# Altium PCB PCB1.PcbDoc
Units mil, origin at the board's own origin, x right, y up, seen from the top; angles counter-clockwise.
Board outline 4163.77 x 2203.22 mil, 2 copper layers (Top Layer, Bottom Layer); 20 components, 11 nets, 51 pads, 7 vias.
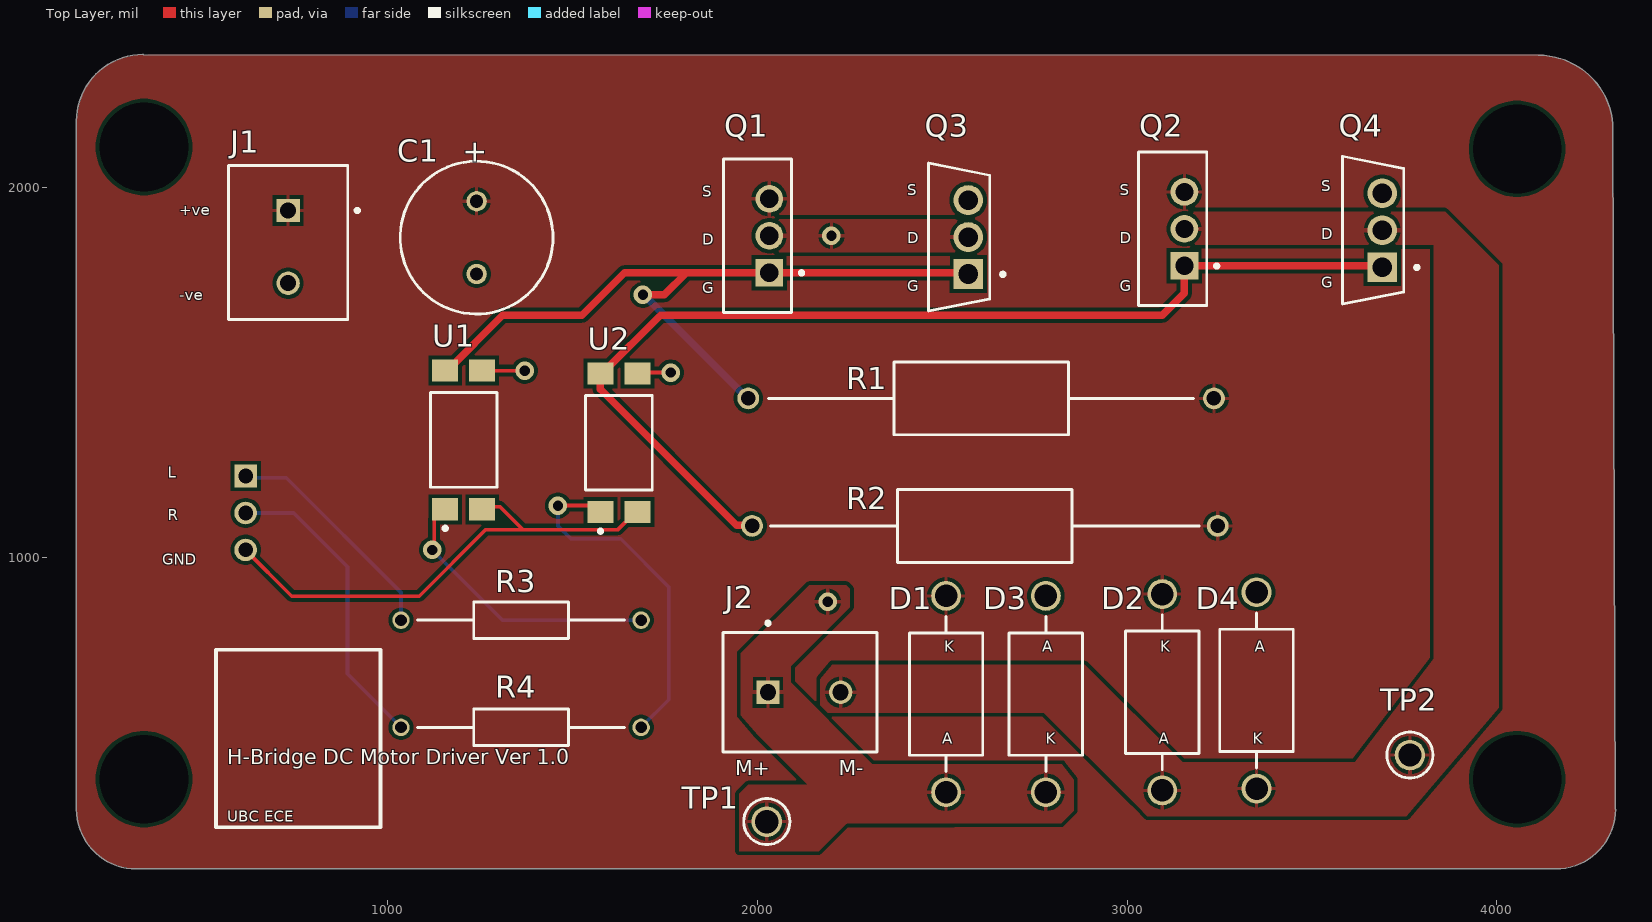
[diagram p0: Top Layer view]
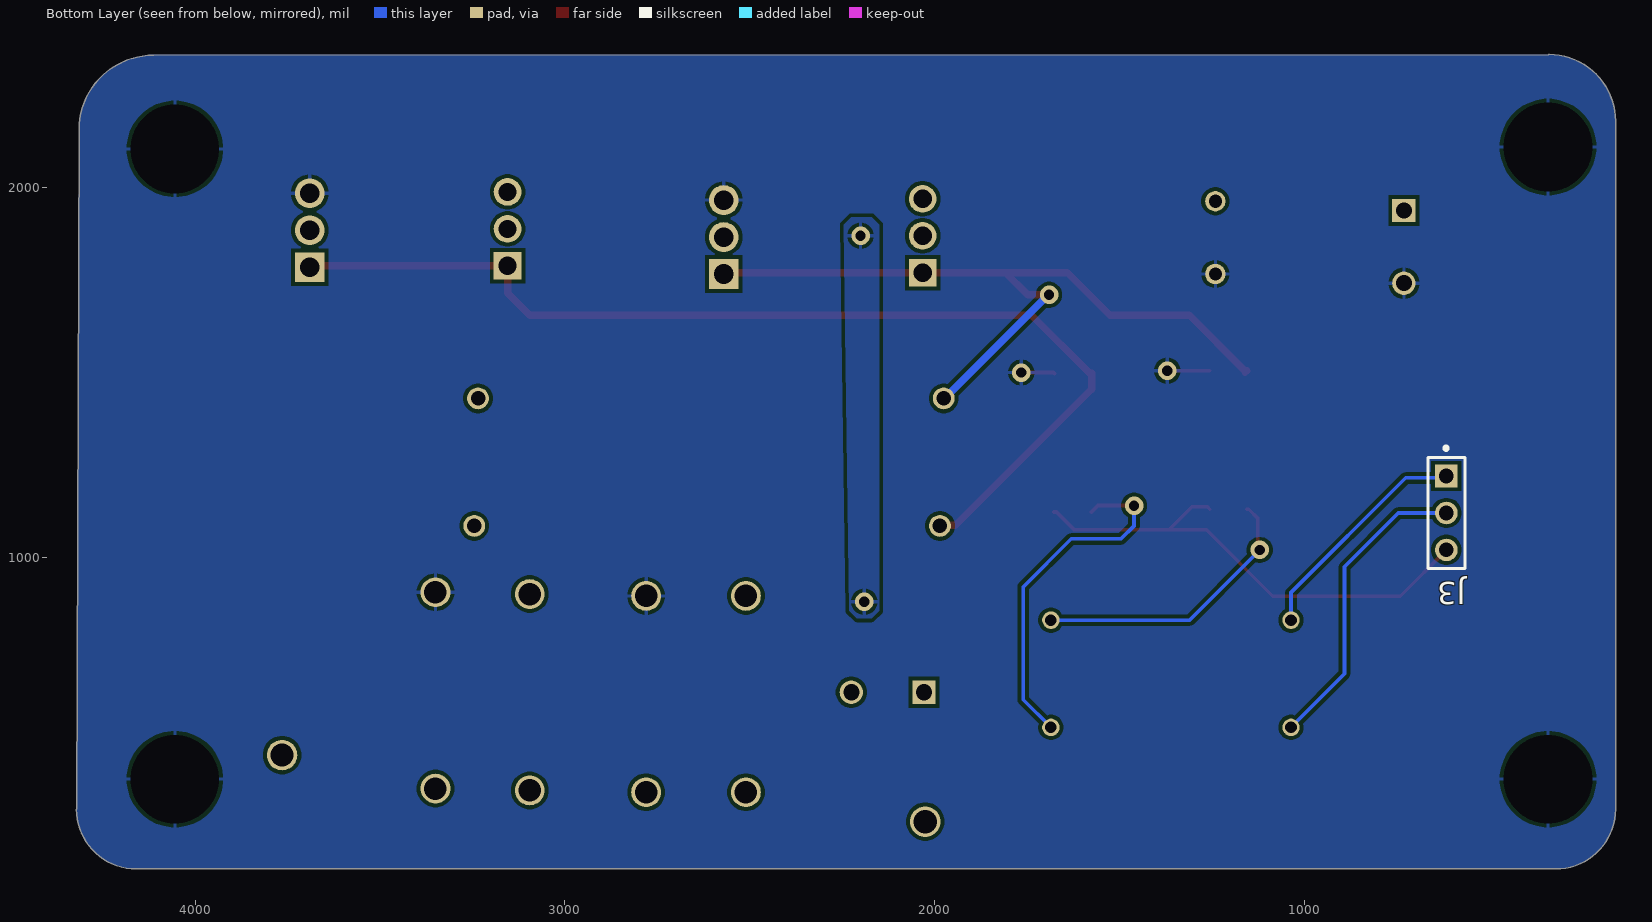
[diagram p1: Bottom Layer view, seen from below]
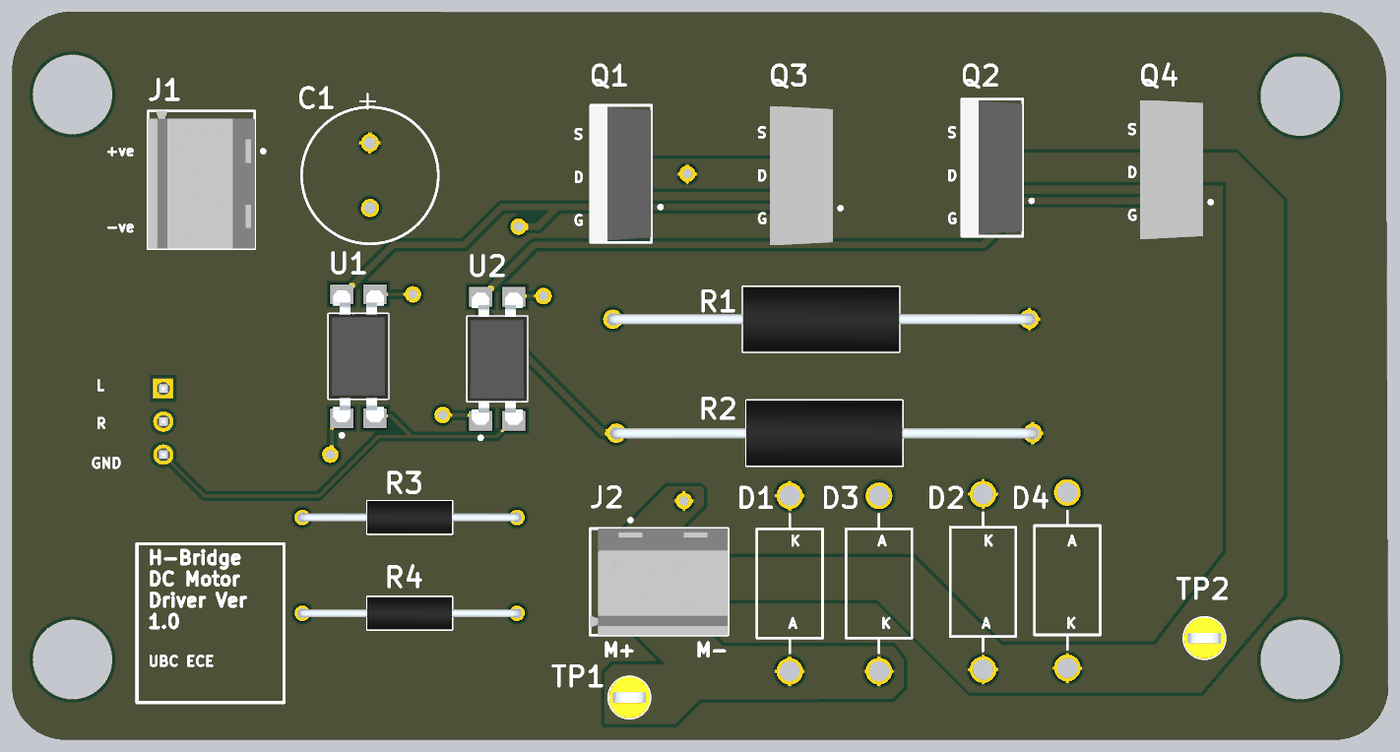
[diagram p2: 3D render of the assembled board from above, using the file's embedded part models]

## Layer stack, top to bottom
Top Solder: solder mask 0.4, Solder Resist, Dk 3.5
Top Layer: signal copper 1.4
Dielectric 1: dielectric 12.6, FR-4, Dk 4.8
Bottom Layer: signal copper 1.4
Bottom Solder: solder mask 0.4, Solder Resist, Dk 3.5

## Board outline
157.45,318.6 ccw(c318.82,318.6) 318.82,157.22 4160,157.22 ccw(c4159.84,318.6) 4321.22,318.6 4320,318.6 4314.31,2156.89 ccw(c4112.54,2156.69) 4112.54,2358.46 337.45,2360 337.45,2360.44 ccw(c337.45,2180.44) 157.45,2180.44

## Design rules (kind name [scope] priority, off if disabled: settings)
Clearance [All] p1: gap=10 ignorepadtopadclearanceinfootprint=FALSE except(0: Arc-Hole Track-Hole SMDPad-Hole THPad-Hole Via-Hole Fill-Hole Poly-Hole Region-Hole Text-Hole)
HoleSize [All] p1: absolutevalues=TRUE maxlimit=500 minlimit=1 maxpercent=80.000 minpercent=20.000
PolygonConnect [All] p1: connectstyle=Relief reliefconductorwidth=10 reliefentries=4 polygonreliefangle="90 Angle" airgapwidth=10
RoutingPriority RoutingPriority_1 [All] p1: routingpriority=0
RoutingPriority [All] p2: routingpriority=0
RoutingVias [All] p1: holewidth=28 width=50 viastyle="Through Hole" minholewidth=28 minwidth=50 maxholewidth=28 maxwidth=50
SMDNeckDown [All] p1: percent=50.000
SolderMaskExpansion [All] p1: expansion=4 istentingtop=FALSE
Width [(InNet('MosfetGateL') AND InNet('MosfetGateR'))] p1: maxlimit=20 minlimit=20 preferedwidth=20 minimp=50.000000 maximp=50.000000 favimp=50.000000
28 further rules are at their usual default settings.

## Components (designator, comment, footprint, x,y, rotation, side; value= is the part's Value field where it differs from the comment)
C1 "470uF" PNSC-CAP-10x20-P2 1240,1865 r270 top
D1 "MUR410RLG" ONSC-AXIAL_LEAD-2-267-05_V 2510,630 r270 top
D2 "MUR410RLG" ONSC-AXIAL_LEAD-2-267-05_V 3095,635 r270 top
D3 "MUR410RLG" ONSC-AXIAL_LEAD-2-267-05_V 2780,630 r90 top
D4 "MUR410RLG" ONSC-AXIAL_LEAD-2-267-05_V 3350,640 r90 top
J1 "282836-2" TECO-282836-2_V 730,1840 r270 top
J2 "282836-2" TECO-282836-2_V 2126.57,635 r0 top
J3 "90120-0763" FP-90120-0763-MFG 615,1120 r270 bottom
Q1 "IRF5305PBF" FP-PG-TO220-3-0 2000,1870 r180 top
Q2 "IRF5305PBF" FP-PG-TO220-3-0 3123.11,1888.62 r180 top
Q3 "IRF540NPBF" Infineon_IRF540NPBF_0 2545.59,1866.38 r180 top
Q4 "IRF540NPBF" Infineon_IRF540NPBF_0 3665.59,1885 r180 top
R1 "10k" RESAD3200W81L1200D500 3234.84,1430 r180 top
R2 "10k" RESAD3200W81L1200D500 3245,1085 r180 top
R3 "220" RESAD1650W60L650D250 1035.39,830 r0 top
R4 "220" RESAD1650W60L650D250 1685,540 r180 top
TP1 "5014" KSTN-5014_V 2025,285 r0 top
TP2 "5014" KSTN-5014_V 3765,465 r0 top
U1 "VO615A-8X017T" VISH-VO615A-XX017T_V 1205,1317.6 r90 top
U2 "VO615A-8X017T" VISH-VO615A-XX017T_V 1625,1310 r90 top

## Footprints (in the part's own frame and the unit in brackets; to place one, negate y for a bottom-side part, rotate by r counter-clockwise, add the part's x,y. Pads: shape width x height; smd on the part's side, far side on the other; paste and mask are expansions set on the pad)
FP-90120-0763-MFG [mm]
  rect 1.55x1.55 hole 1 paste-1000 mask+0: 1(-2.54,0)
  round 1.55 hole 1 paste-1000 mask+0: 2(0,0) 3(2.54,0)
  silkscreen extent -4.57,-1.27 3.81,1.27, body extent -3.81,-1.25 3.81,1.25, height 9.65
FP-PG-TO220-3-0 [mm]
  rect 1.9x1.9 hole 1.25 paste-1000 mask+0: 1(-0.81,2.54)
  round 1.9 hole 1.25 paste-1000 mask+0: 2(-0.81,0) 3(-0.81,-2.54)
  silkscreen extent -3.15,-5.27 2.35,5.27, body extent -2.44,-5.37 2.44,5.37, height 0.25
Infineon_IRF540NPBF_0 [mm]
  rect 2.05x2.05 hole 1.35 paste-1000 mask+0: 1(-0.62,2.54)
  round 2.05 hole 1.35 paste-1000 mask+0: 2(-0.62,0) 3(-0.62,-2.54)
  silkscreen extent -3.13,-5.08 2.1,5.08, body extent -2.51,-5.56 2.51,5.56, height 0.25
KSTN-5014_V [mm] "Test Point, Dia 3.17mm"
  round 2.1 hole 1.6: 1(0,0)
  silkscreen extent -1.59,-1.58 1.59,1.58, body extent -1.59,-1.59 1.59,1.59, height 8.13
ONSC-AXIAL_LEAD-2-267-05_V [mm] "AXIAL, 2-Leads, Diameter 5.05mm"
  round 2.05 hole 1.55: 1(-6.745,0) 2(6.745,0)
  silkscreen extent -5.32,-2.52 5.32,2.52
PNSC-CAP-10x20-P2 [mm] "THD, 2-Leads, Dia 10.5mm, Body Length 22mm, Pin Spacing 5mm"
  round 1.4 hole 0.9: 1(-2.5,0) 2(2.5,0)
  silkscreen extent -5.25,-5.25 5.25,5.25, body extent -5.25,-5.25 5.25,5.25, height 22
RESAD1650W60L650D250 [mm]
  round 1.2 hole 0.8: 1(0,0) 2(16.5,0)
  silkscreen extent 1.13,-1.25 15.36,1.25, body extent -0.3,-1.25 16.8,1.25, height 2.49
RESAD3200W81L1200D500 [mm]
  round 1.5 hole 1: 1(0,0) 2(32,0)
  silkscreen extent 1.39,-2.5 30.6,2.5, body extent -0.4,-2.5 32.41,2.5, height 5
TECO-282836-2_V [mm] "Female Header, Pitch 5mm, 1 x 2 Position, Height 10mm"
  rect 1.6x1.6 hole 1.1: 1(-2.5,0)
  round 1.6 hole 1.1: 2(2.5,0)
  silkscreen extent -5.6,-4.1 5,4.88, body extent -5.6,-4.1 5,4.1, height 10
VISH-VO615A-XX017T_V [mm] "SMD, 4-Leads, Body 6.5x4.58mm, Pitch 2.54mm"
  rect 1.52x1.78 smd: 1(-4.765,1.27) 2(-4.765,-1.27) 3(4.765,-1.27) 4(4.765,1.27)
  silkscreen extent -6.2,-2.29 3.25,2.29, body extent -5.08,-2.29 5.08,2.29, height 3.69

## Part data
C1: library part CMP-2000-05308-1, "Aluminum Electrolytic Capacitor, 470 uF, +/- 20%, 50 V, -55 to 105 degC, 2-Pin THD, RoHS, Bulk", Capacitance=470µF, Case Size/Dimension=Ø10x20mm, Lifetime@Temperature=2000Hrs@105degC, Manufacturer=Panasonic, Operating Temp Range=-55to+105degC, Operating Temp-Max=105degC, Package Description="2-Pin Through Hole Device, Dia 10 mm, Body Length 20 mm, Pin Spacing 5 mm", Package Reference=CAP-10x20-P2, Package Version=Nov-12, Rated Voltage=50V, Ripple Current=530mA, Datasheet URL=http://www.alliedelec.com/images/products/datasheets/bm/Panasonic/70067776.pdf, Datasheet Version=Nov-12, Manufacturer URL=http://www.panasonic.com/, Package URL=http://www.alliedelec.com/images/products/datasheets/bm/Panasonic/70067776.pdf, Series=NHG, Type=Radial
D1 D2 D3 D4: library part CMP-0902-00013-1, "SWITCHMODE(TM) Power Rectifier, 2-Pin Axial_Lead, Pb-Free, Tape and Reel", Manufacturer="On Semiconductor", ComponentLink1Description="Manufacturer URL", ComponentLink1URL=http://www.onsemi.com/, ComponentLink2Description=Datasheet, ComponentLink2URL=http://www.onsemi.cn/pub_link/Collateral/MUR420-D.PDF, ComponentLink3Description="Package Specification", ComponentLink3URL=http://www.onsemi.com/pub_link/Collateral/267-05.PDF, DatasheetVersion="Rev. 15", IFSM Max (A)=125, Mounting Technology="Through Hole", PackageDescription="2-Pin, Axial Lead, Diameter 5.05 mm", PackageReference=AXIAL_LEAD-2-267-05, PackageVersion="Rev. G, 06/2000", Packing="Tape and Reel", PartNumber=MUR410RLG, RoHS=TRUE, Type=Ultrafast, VRRM Max (V)=100
J1 J2: library part CMP-1684-00017-1, "Female Header, Pitch 5 mm, 1 x 2 Position, Height 10 mm, Tail Length 3.5 mm, Rohs, Bulk", Color=Green, Current=13.5A, Manufacturer="TE Connectivity", Package Description="Female Header, Pitch 5 mm, 1 x 2 Position, Height 10 mm, Tail Length 3.5 mm", Package Reference=THD, Standard Package=300, Voltage=300V, 3D Model=282836-2.pdf, Category=Connectors,Interconnects, Clamp Material - Plating=Brass-NickelPlated, Contact Material - Plating=Brass-TinPlated, Datasheet URL=http://www.te.com.cn/commerce/DocumentDelivery/DDEController?Action=showdoc&DocId=Catalog+Section%7F1308389_EUROSTYLE_TERMINAL_BLOCKS%7F0607%7Fpdf%7FEnglish%7FENG_CS_1308389_EUROSTYLE_TERMINAL_BLOCKS_0607.pdf%7F282836-2, Dynamic Catalog=BuchananSeries, Family=TerminalBlocks-WiretoBoard, Featured Product=EurostyleTerminalBlockConnectors, Features=Interlocking(Side), Housing Material=Polyamide(PA66),Nylon6/6, Manufacturer URL=http://www.te.com, Mating Orientation=HorizontalwithBoard, Mounting Type=ThroughHole, Number of Levels=1, Other Names="5ULV-02B / A98076", Packaging=Bulk, Pitch="0.197\"(5.00mm)", Positions Per Level=2, Product Training Modules=Wire-to-BoardEurostyleTerminalBlocks, RoHS Information=282836-2StatementofCompliance, Screw Material - Plating=Brass-NickelPlated, Screw Thread=M3, Series=Buchanan, Torque - Screw=0.68Nm(6Lb-In), Wire Gauge=16-30AWG, Wire Termination=Screw-RisingCageClamp
J3: library part CMP-04776-000084-1, "CONN HEADER VERT 3POS 2.54MM", Current Rating=3A, Manufacturer=Molex, Temperature="-55°C to +125°C", Temperature Range High=+125°C, Temperature Range Low=-55°C, Voltage Rating=350V, Automotive=No, Category=Conn, ComponentLink2Description=Datasheet, ComponentLink2URL=https://www.molex.com/webdocs/datasheets/pdf/en-us/0901200763_PCB_HEADERS.pdf, Conn Gender=Male, Conn Orientation=Vertical, Contact Material=Gold,Nickel, Device Class L1=Connectors, Device Class L2="Headers and Wire Housings", Device Class L3=unset, Digikey Description="CONN HEADER VERT 3POS 2.54MM", Footprint Url=https://www.molex.com/pdm_docs/sd/901200763_sd.pdf, Height=5.8mm, Lead Free=Yes, Manufacturer Part Number=90120-0763, Mouser Description="Board-To-Board Connector, C-Grid III 90120 Series, Through Hole, Header, 3, 2.54 mm", Number of Contacts=3, Number of Rows=1, Octopart=https://octopart.com/90120-0763-molex-655433, Package=90120-0763, Pitch=2.54mm, RoHS=TRUE
Q1 Q2: library part CMP-32901-000003-1, "MOSFET P-CH 55V 31A TO-220AB", Continuous Drain Current=-31A, Drain To Source Breakdown Voltage=-55V, Drain To Source Resistance=0.06Ω, Gate To Source Voltage=20V, Input Capacitace At Vds="1200pF @ -25V", Manufacturer=Infineon, Max Forward Diode Voltage=-1.3V, Max Junction Temp=+175°C, Package=PG-TO220-3, Power Dissipation=110W, Pulse Drain Current=-110A, Temperature="-55°C to +175°C", Temperature Range Low=-55°C, Automotive=No, Category=Trans, ComponentLink2Description=Datasheet, ComponentLink2URL=https://www.infineon.com/dgdl/irf5305pbf.pdf?fileId=5546d462533600a4015355e370101993, Depletion Mode=False, Device Class L1="Discrete Semiconductors", Device Class L2=Transistors, Device Class L3=MOSFETs, Digikey Description="MOSFET P-CH 55V 31A TO-220AB", Drain To Source Voltage=-55V, Gate Charge At Vgs="63nC @ -10V", Height=19.3mm, Lead Free=Yes, Manufacturer Part Number=IRF5305PBF, Number Of Channels=1, Number Of P Channels=1, Octopart=https://octopart.com/irf5305pbf-infineon-65873396, Reverse Recovery Charge=170nC, Reverse Recovery Time=71ns, RoHS=TRUE, Rthja Max=62°C/W, Standoff Height=3.55mm, Temperature Range High=+175°C, Threshold Vgs Max=-4V, Threshold Vgs Min=-2V, Turn Off Delay Time=39ns, Turn On Delay Time=14ns
Q3 Q4: library part Trans_Infineon_IRF540NPBF_eec, "TRANS MOSFET N-CH 100V 33A TO-220AB", Current - Continuous Drain (Id) @ 25°C=33A, Digikey Part Number=IRF540NPBF-ND, Manufacturer=Infineon, Mouser Part Number=942-IRF540NPBF, Package=TO-220AB, Power Dissipation (Max)=130W, Temperature="-55°C to +175°C", Temperature Range High=+175°C, Temperature Range Low=-55°C, ComponentLink1Description=Upverter, ComponentLink1URL=https://upverter.com/upn/revision/62782e0a3528cc6f/, ComponentLink2Description=Datasheet, ComponentLink2URL=https://upverter.com/datasheet/5308f6ed8ea707896f3dcb9c5bff2bbed3412a6b.pdf, Digikey Description="TRANS MOSFET N-CH 100V 33A TO-220AB", helpURL=https://upverter.com/upn/revision/62782e0a3528cc6f/, Ipc Land Pattern Name=TO-220, Lead Free=yes, Part Number=IRF540NPBF, Price=0.985460972103, RoHS=TRUE, Supplier 1=Digi-Key, Supplier 2=Mouser, Supplier Part Number 1=IRF540NPBF-ND, Supplier Part Number 2=942-IRF540NPBF, Vgs (Max)=±20V
R1 R2: library part OM1035E-R58, "Resistor", Manufacturer_Name=Ohmite, Mouser Part Number=588-OM1035E-R58, Datasheet Link=https://www.mouser.com/datasheet/2/942/SF_AGH_Series-1508337.pdf, Manufacturer_Part_Number=OM1035E-R58, Mouser Price/Stock=https://www.mouser.co.uk/ProductDetail/Ohmite/OM1035E-R58?qs=AkUtuiJmyfk0HzUJmzHVdA%3D%3D
R3 R4: library part MRS25000C2200FCT00, "Resistor", Manufacturer_Name=Vishay, Mouser Part Number=594-MRS25000C2200FCT, Arrow Part Number=MRS25000C2200FCT00, Arrow Price/Stock=https://www.arrow.com/en/products/mrs25000c2200fct00/vishay, Datasheet Link=http://www.vishay.com/docs/28724/mrs16m25.pdf, Manufacturer_Part_Number=MRS25000C2200FCT00, Mouser Price/Stock=https://www.mouser.co.uk/ProductDetail/Vishay-BC-Components/MRS25000C2200FCT00?qs=VfXS90KdVcZ%2FSi5qHqznqg%3D%3D
TP1 TP2: library part CMP-1672-00006-4, "Test Point, Yellow, Through Hole, RoHS, Bulk", Colour=Yellow, Manufacturer=Keystone, Package Quantity=100, ComponentLink1Description="Manufacturer URL", ComponentLink1URL=http://www.keyelco.com/, ComponentLink2Description=Datasheet, ComponentLink2URL=http://www.keyelco.com/product-pdf.cfm?p=1323, Contact Material=Bronze, Contact Plating=Silver, DatasheetVersion="Rev. F, 12/2013", Height="8.12 mm", Mount="Through Hole", Mounting Technology="Through Hole", PackageDescription="1-Pin Through Hole Device, Dia 3.17 mm", PackageReference=5014, Packaging=Bulk, REACH SVHC="No SVHC", RoHSCompliant=true
U1 U2: library part CMP-2000-07399-1, "Optocoupler, Phototransistor Output, High Temperature, 5000 VRMS, -55 to 110 degC, 4-Pin SMD, RoHS, Tape and Reel", Current - DC Forward (If)=60mA, Current - Output / Channel=50mA, Current Transfer Ratio (Max)=260%@5mA, Current Transfer Ratio (Min)=130%@5mA, Manufacturer=Vishay, Operating Temperature=-55°C~110°C, Package / Case=4-SMD,GullWing, Package Description="4-Pin Surface Mount Device, Body 6.5 x 4.58 mm, Pitch 2.54 mm", Package Reference=VO615A-XX017T, Standard Package=1, Supplier Device Package=4-SMD, Voltage - Forward (Vf) (Typ)=1.43V, Voltage - Isolation=5000Vrms, Voltage - Output=70V, Category=Isolators, Current - DC Forward (If) (Max)=60mA, Datasheet URL=http://www.vishay.com/docs/81753/vo615a.pdf, Datasheet Version="Rev. 2.2, 09/2013", Dynamic Catalog=VOS615A,VOS617A,VOS618ASeries, Family=Optoisolators-Transistor,PhotovoltaicOutput, Input Type=DC, Manufacturer URL=http://www.vishay.com/, Minimum Quantity=1, Mounting Technology=SurfaceMount, Mounting Type=SurfaceMount, Number Of Channels=1, Other Names=VO615A-8X017TDKR, Output Type=Transistor, Package/Case=4-SMD,GullWing, Packaging=Digi-Reel®, Quantity Available=Tape&Reel(TR)AlternatePackaging, Rise / Fall Time (Typ)=3µs,4.7µs, Turn On / Turn Off Time (Typ)=6µs,5µs, Vce Saturation (Max)=300mV, Voltage - Output (Max)=70V

## Free pads (board coordinates)
  round 60 hole 240: 3(340,400) 3(340,2110) 3(4055,400) 3(4055,2105)

## Via types
v1: diameter 50, hole 28, Top Layer to Bottom Layer, 7 vias

## Nets (pads, with @x,y where several pads share a name; then routed paths per layer and width w, separated by ;. In a path a pad name is that pad's centre, name@x,y a point inside that pad or via, vN(x,y) a via of type N, cw(c..) or ccw(c..) an arc to the next point about the centre after c; other vN are vias at no path point)
GND: C1.2 D3.2 D4.2 J1.2 pad.3 Q3.3 Q4.3 U1.3 U2.3 | length 206.1
  Top Layer w10: U1.3 1369.8,1505.2 v1(1370,1505) ; U2.3 1677.4,1500 v1(1765,1500)
LEFT: J3.1 R3.1 | length 625.6
  Bottom Layer w10: J3.1 620,1215 725,1215 1035.39,904.61 R3.1
MosfetGateL: Q1.1 Q3.1 R1.2 U1.4 | length 2077
  Top Layer w10: Q3.1@2566.38,1770 Q3.1
  Top Layer w20: U1.4@1160,1500.2 U1.4 1160.12,1505.2 1309.92,1655 1525,1655 1640,1770 1807.91,1770 ; v1(1690,1710) 1747.91,1710 1807.91,1770 ; Q3.1@2566.38,1770 2406.38,1770 Q1.1 1807.91,1770
  Bottom Layer w10: v1(1690,1710) v1@1692.5,1710 ; R1.2@1972.5,1430 R1.2
  Bottom Layer w20: v1@1692.5,1710 R1.2@1972.5,1430
MosfetGateR: Q2.1 Q4.1 R2.2 U2.4 | length 2867.8
  Top Layer w10: U2.4 U2.4@1580.12,1497.6 ; Q4.1@3686.38,1788.62 Q4.1
  Top Layer w20: U2.4 1575,1455 1942.99,1087.01 1983.14,1087.01 R2.2 ; U2.4@1580.12,1497.6 1737.52,1655 3095.32,1655 3154.64,1714.31 3154.64,1769.64 Q2.1@3155,1770 ; Q2.1 Q4.1@3686.38,1788.62
Motor+: D1.2 D3.1 J2.1 Q1.2 Q3.2 TP1.1 | length 10.8
  Top Layer w10: Q1.2 2031.89,1868.11 2035,1865 Q1.2@2038.19,1868.19
  other v1: 2190,880 2200,1870
Motor-: D2.2 D4.1 J2.2 Q2.2 Q4.2 TP2.1
NetR3_2: R3.2 U1.1 | length 771.2
  Top Layer w10: v1(1120,1020) 1125,1025 1125,1105.08 1149.92,1130 U1.1
  Bottom Layer w10: v1(1120,1020) 1310,830 R3.2
NetR4_1: R4.1 U2.1 | length 956.7
  Top Layer w10: v1(1460,1140) 1557.4,1140 U2.1
  Bottom Layer w10: v1(1460,1140) 1460,1085 1495,1050 1630,1050 1760,920 1760,615 R4.1
RIGHT: J3.2 R4.2 | length 830.3
  Bottom Layer w10: J3.2 745,1120 890.52,974.48 890.52,684.87 R4.2
uCGND: J3.3 U1.2 U2.2 | length 1347.1
  Top Layer w10: J3.3 740,895 1085,895 1265,1075 1365,1075 ; U1.2 1262.24,1137.24 1302.76,1137.24 1365,1075 ; U2.2@1677.4,1122.4 U2.2 1669.88,1122.4 1622.48,1075 1365,1075
VCC: C1.1 D1.1 D2.1 J1.1 Q1.3 Q2.3 R1.1 R2.1 | length 18.3
  Top Layer w10: J1.1@725,1935 728.43,1938.43 J1.1 ; D1.1@2500,900 2504.45,895.55 D1.1

## Polygon pours and split planes (outlines as drawn)
Motor+ on Top Layer "NONET_L-01_P-001" (solid, pour order 1): 1950,360 1950,205 2165,205 2245,285 2245,320 2180,385 1975,385
VCC on Top Layer "VCC_L01_P016" (solid, pour order 16): 350.01,2360 313.51,2358.46 279.05,2350.7 246.15,2335.57 216.56,2313.81 192.37,2286.99 174,2255.84 163.37,2218.48 157.88,2180.44 158.54,299.83 163.98,273.16 174,247.5 188.6,223.29 207.4,201.87 229.32,184.32 255.3,170.25 282.9,161.27 313.51,157.22 4160.23,157.22 4189.9,160.05 4219.43,168.63 4247.8,183.3 4271.27,201.87 4290.8,224.3 4306.69,251.68 4317.14,282.55 4320,315 4313.64,2173.01 4309.16,2201.98 4299.44,2232.7 4285.37,2260.81 4266.59,2286.99 4237.47,2315.13 4220.28,2327.28 4201.65,2337.72 4183.99,2345.39 4165.55,2351.37 4125,2360
Motor- on Top Layer "MOTOR-_L01_P013" (solid, pour order 13): 3755,300 3505,300 3830,725 3830,1845 3105,1845 3105,1935 3750,1935 3860,1935 4005,1790 4005,593.48
Motor+ on Top Layer "MOTOR+_L01_P003" (solid, pour order 3): 1968.26,679.92 2071.27,680 2310,440 2823.59,440 2855,398.71 2855,315 2821.16,281.16 2241.23,278.77 2000,520 1955,572.96 1955,680.03
Motor- on Top Layer "MOTOR-_L01_P006" (solid, pour order 6): 2170,670 2170,600 2190,580 2775,580 3010,345 3030,325 3055,300 3750,300 3795,445 3150,445 2885,710 2202,710
Motor+ on Top Layer "MOTOR+_L01_P007" (solid, pour order 7): 1970,1915 2135,1915 2260,1915 2535,1915 2610,1865 2535,1825 1975,1825 1970,1830 1970,1850 1965,1855 1965,1905 1970,1905
Motor+ on Top Layer "MOTOR+_L01_P012" (solid, pour order 12): 2140,925 2240,925 2250,915 2250,865 2090,705 2090,660 1955,660 1955,740
GND on Bottom Layer "GND_L02_P009" (solid, pour order 9): 285.42,2352.76 256.71,2341.32 241.84,2332.95 227.99,2323.33 215.39,2312.73 203.47,2300.65 192.55,2287.24 183.04,2272.95 174.79,2257.53 168.32,2242.06 162.38,2211.42 157.45,2180.44 157.45,295 164.85,270.26 174.79,245.82 189.92,221.51 208.81,200.53 229.49,184.21 252.62,171.43 257.14,169.47 277.84,162.81 283.02,161.24 303.96,157.22 4112.54,157.22 4160,157.22 4181.84,158.73 4195.65,161.24 4215.96,167.29 4229.47,173.02 4246.99,182.78 4259.06,191.33 4270.86,201.48 4280.8,211.77 4290.5,223.89 4299.53,237.8 4306.9,252.15 4310.96,261.98 4314.31,271.87 4317.43,283.85 4319.87,297.77 4320.02,311.97 4314.31,2168.29 4309.87,2198.79 4300.77,2229.34 4286.08,2259.61 4266.38,2287.24 4238.15,2314.59 4221.69,2326.38 4204.31,2336.38 4185.79,2344.69 4165.84,2351.29 4125,2360 3550,2360 318.82,2360
Motor+ on Bottom Layer "MOTOR+_L02_P004" (solid, pour order 4): 2150,1900 2170,1920 2225,1920 2245,1900 2230,855 2210,835 2170,835 2150,855 2150,945

## Silkscreen, mask and mechanical layers (free items; w line width, h text height)
Top Overlay:
  lines w10: 535,270 980,270 980,750 535,750 535,270
  text "S" at 3525,1990 h30
  text "S" at 2405,1980 h30
  text "S" at 2980,1980 h30
  text "S" at 1850,1975 h30
  text "+ve" at 435,1925 h30
  text "D" at 3525,1860 h30
  text "D" at 2405,1850 h30
  text "D" at 2980,1850 h30
  text "D" at 1850,1845 h30
  text "G" at 3525,1730 h30
  text "G" at 2405,1720 h30
  text "G" at 2980,1720 h30
  text "G" at 1850,1715 h30
  text "-ve" at 435,1695 h30
  text "L" at 405,1215 h30
  text "R" at 405,1100 h30
  text "GND" at 390,980 h30
  text "K" at 2505,745 h30
  text "A" at 2770,745 h30
  text "K" at 3090,745 h30
  text "A" at 3345,745 h30
  text "A" at 2500,495 h30
  text "K" at 2780,495 h30
  text "A" at 3085,495 h30
  text "K" at 3340,495 h30
  text "H-Bridge DC Motor Driver Ver 1.0" at 565,440 h40
  text "M+" at 1940,410 h40
  text "M-" at 2220,410 h40
  text "UBC ECE" at 565,285 h30
Mechanical 1:
  lines w10: 337.45,2360 4112.54,2358.46 cw(c4112.54,2156.69) 4314.31,2156.89 4320,318.6 ; 337.45,2360.44 ccw(c337.45,2180.44) 157.45,2180.44 157.45,318.52 ccw(c318.74,318.52) 318.74,157.22 4160,157.22 ccw(c4159.84,318.6) 4321.22,318.6

## Text inside footprints (layer, text, board x,y; h text height)
C1: Top Overlay "+" at 1210,2130 h59.06 r270